# EAGLE board mm232-ser (EAGLE 5.07)
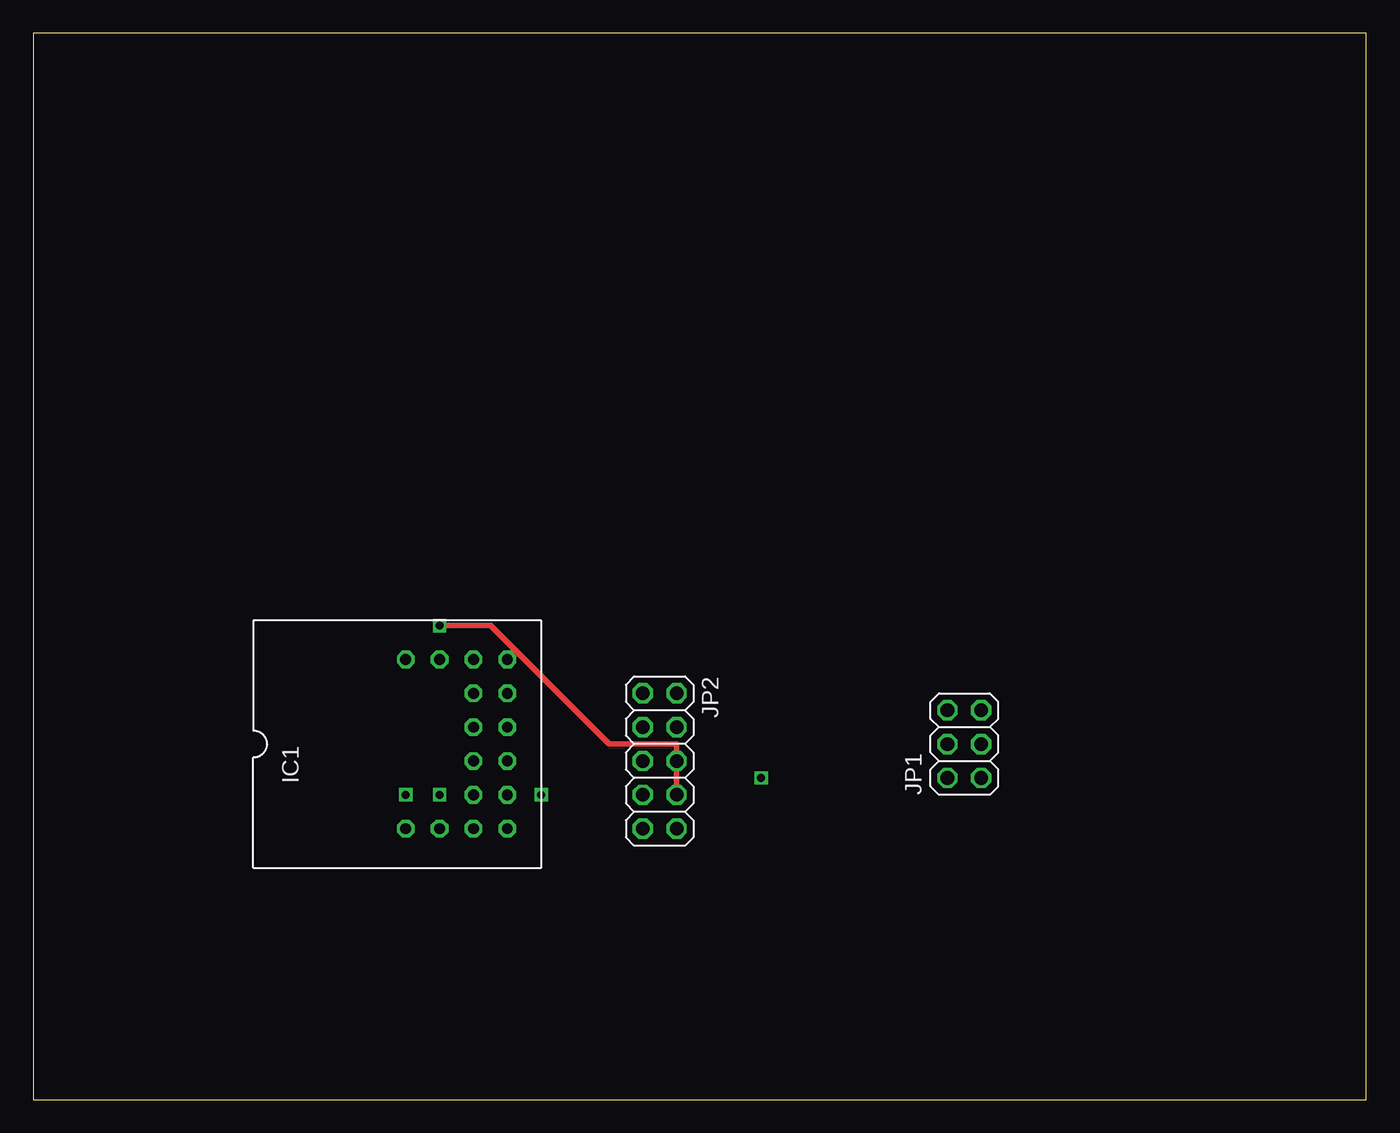
[diagram p0: board, top side]
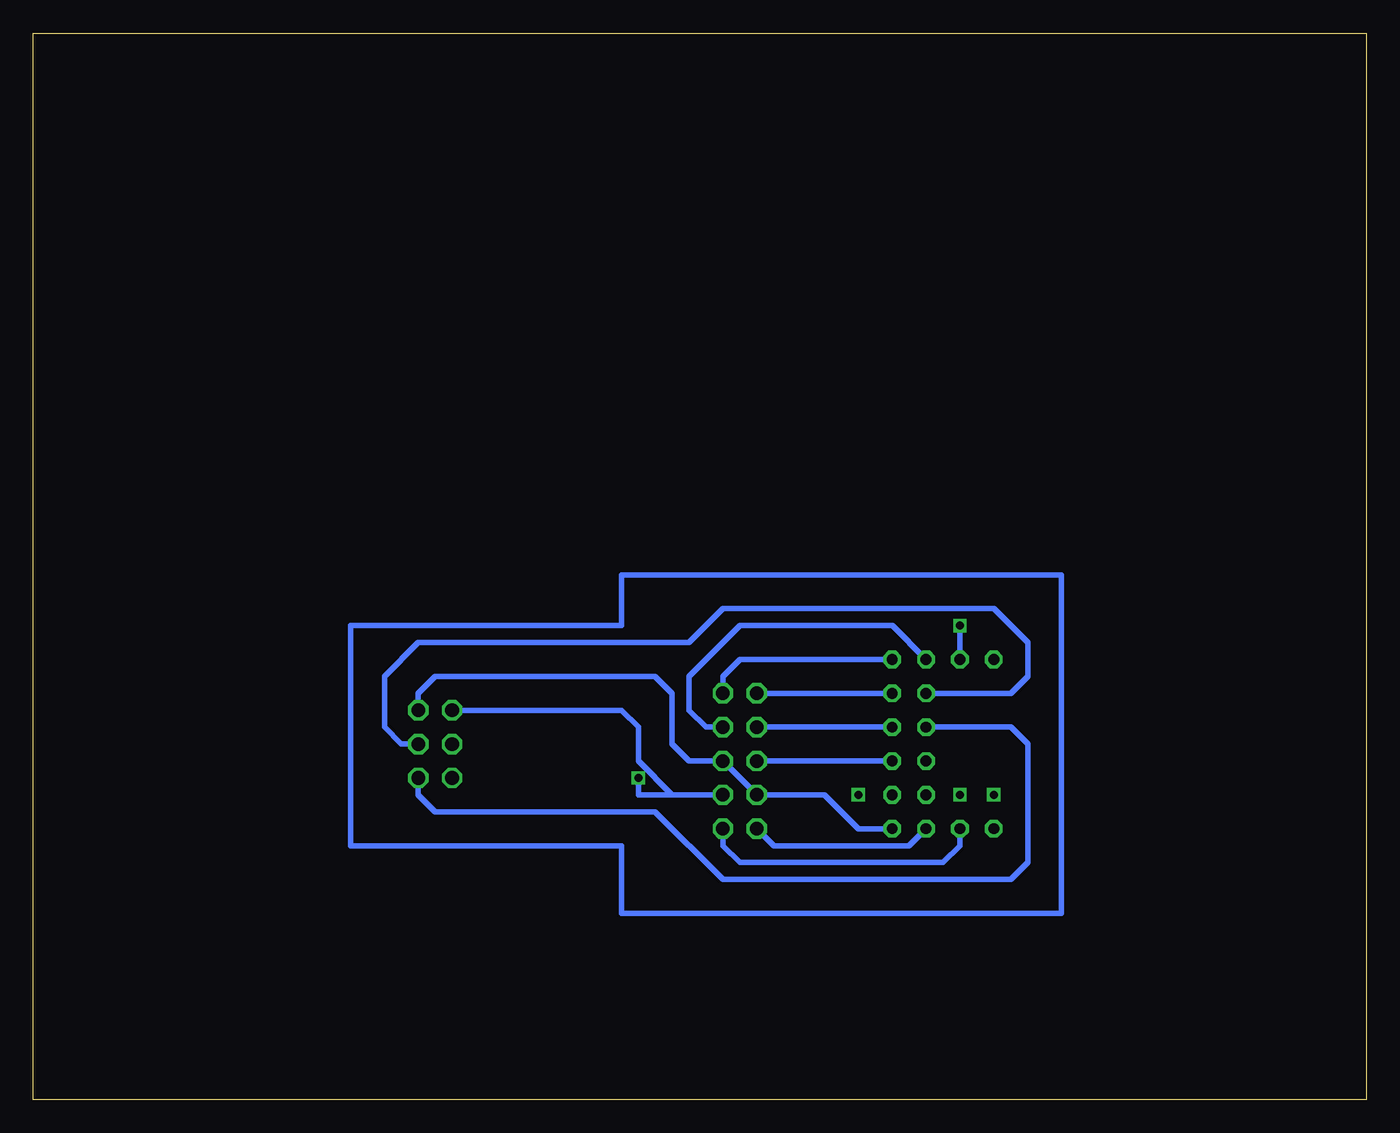
[diagram p1: board, bottom side, seen from below]

Size 100 x 80 mm. Coordinates in mm from the lower left corner, seen from the top.
Outline: 0,0 100,0 100,80 0,80 0,0
Copper layers (1*16): Top 0.0356mm / dielectric 1.5011mm / Bottom 0.0356mm
Design rules "default": minimum track width 7mil, minimum drill 14mil, track to track 7mil, track to pad 7mil, pad to pad 7mil, via to via 7mil, smd to smd 0mil, copper to edge 20mil, drill to drill 8mil, minimum pad ring 10mil, minimum via ring 8mil, stop-mask expansion 4mil, vias tented up to drill 0mil, thermal gap 10mil

## Footprints (pad centres in the part's own frame; a part is rotated, then mirrored left to right if it is on the bottom)
DIL16 = drill 0.813 octagon: 1-SHLD 7.62,6.35; 2-VCC 10.16,6.35; 3-VCCIO 12.7,6.35; 4-VCC30 15.24,6.35; 5-TXD 12.7,3.81; 6-RTS# 15.24,3.81; 7-RXD 12.7,1.27; 8-CTS# 15.24,1.27; 9-CLK12M 15.24,-1.27; 10-SLEEP# 12.7,-1.27; 11-RESET# 15.24,-3.81; 12-PWREN 12.7,-3.81; 13-GND 15.24,-6.35; 14-VCC50 12.7,-6.35; 15-USBPWR 10.16,-6.35; 16-SHLD 7.62,-6.35
2X03 = drill 1.016 octagon: 1 -2.54,-1.27; 2 -2.54,1.27; 3 0,-1.27; 4 0,1.27; 5 2.54,-1.27; 6 2.54,1.27
2X05 = drill 1.016 octagon: 1 -5.08,-1.27; 2 -5.08,1.27; 3 -2.54,-1.27; 4 -2.54,1.27; 5 0,-1.27; 6 0,1.27; 7 2.54,-1.27; 8 2.54,1.27; 9 5.08,-1.27; 10 5.08,1.27

## Placement (x,y rotation side)
IC1  [DIL16]  20.32,26.67 0 top
JP1  [2X03]  69.85,26.67 90 top
JP2  [2X05]  46.99,25.4 270 top

## Library data of the parts
IC1 = dbg-misc
JP1 JP2 = pinhead

## Nets
N$1: IC1.3-VCCIO JP2.4
N$2: IC1.5-TXD JP1.3
N$3: IC1.13-GND JP1.5 JP2.6 JP2.7
N$4: IC1.2-VCC JP1.6 JP2.8
N$5: IC1.6-RTS# JP2.1
N$6: IC1.8-CTS# JP2.3
N$7: IC1.9-CLK12M JP2.5
N$8: IC1.14-VCC50 JP2.9
N$9: IC1.15-USBPWR JP2.10
N$11: IC1.7-RXD JP1.1
N$12: IC1.4-VCC30 JP2.2

## Tracks (layer width: path | path; a pad name or v marks a point on that pad's centre or on a via)
N$1
  Bottom 0.406: IC1.3-VCCIO 35.56,35.56 46.99,35.56 50.8,31.75 50.8,29.21 49.53,27.94 JP2.4
N$2
  Bottom 0.406: IC1.5-TXD 26.67,30.48 25.4,31.75 25.4,34.29 27.94,36.83 48.26,36.83 50.8,34.29 71.12,34.29 73.66,31.75 73.66,27.94 72.39,26.67 JP1.3
N$3
  Bottom 0.406: IC1.13-GND 38.1,20.32 40.64,22.86 JP2.7 JP2.6 50.8,25.4 52.07,26.67 52.07,30.48 53.34,31.75 69.85,31.75 71.12,30.48 JP1.5
N$4  (via drill 0.6)
  Top 0.406: v30.48,35.56 34.29,35.56 43.18,26.67 48.26,26.67 JP2.8
  Bottom 0.406: JP1.6 55.88,29.21 54.61,27.94 54.61,25.4 52.07,22.86 JP2.8 54.61,22.86 54.61,24.13 | IC1.2-VCC v30.48,35.56
N$5
  Bottom 0.406: IC1.6-RTS# JP2.1
N$6
  Bottom 0.406: IC1.8-CTS# JP2.3
N$7
  Bottom 0.406: IC1.9-CLK12M JP2.5
N$8
  Bottom 0.406: IC1.14-VCC50 34.29,19.05 44.45,19.05 JP2.9
N$9
  Bottom 0.406: IC1.15-USBPWR 30.48,19.05 31.75,17.78 46.99,17.78 48.26,19.05 JP2.10
N$10  (via drill 0.6)
  other vias: 30.48,35.56
N$11
  Bottom 0.406: IC1.7-RXD 26.67,27.94 25.4,26.67 25.4,17.78 26.67,16.51 48.26,16.51 53.34,21.59 69.85,21.59 71.12,22.86 JP1.1
N$12
  Bottom 0.406: IC1.4-VCC30 46.99,33.02 48.26,31.75 JP2.2
N$13  (via drill 0.6)
  other vias: 54.61,24.13
N$14  (via drill 0.6)
  other vias: 27.94,22.86
N$15  (via drill 0.6)
  other vias: 38.1,22.86
N$16  (via drill 0.6)
  other vias: 30.48,22.86
N$17
  Bottom 0.406: 22.86,13.97 55.88,13.97 55.88,19.05 76.2,19.05 76.2,35.56 55.88,35.56 55.88,39.37 22.86,39.37 22.86,13.97